# Allegro board 100ask_imx6ull_V11_1230FINAL.brd
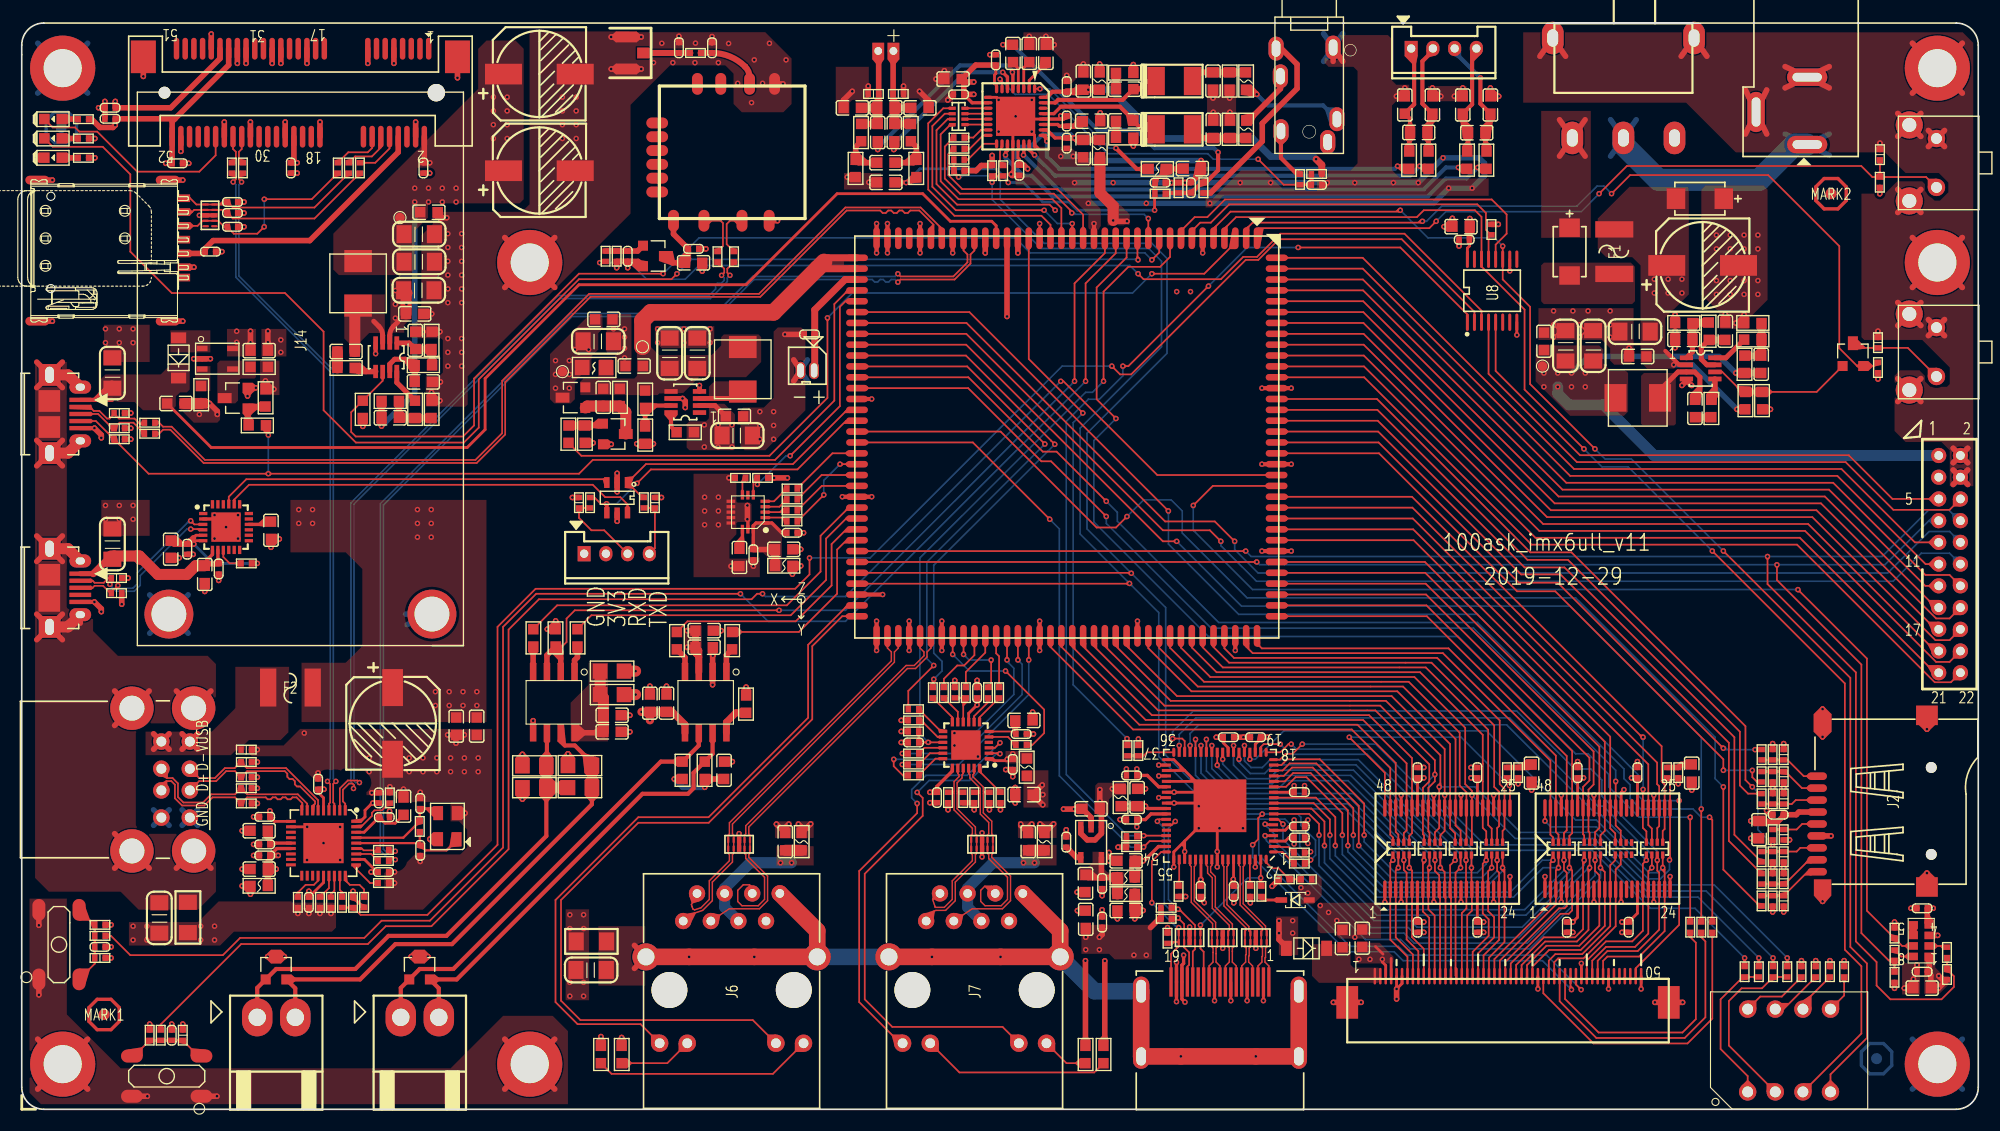
[diagram p0: board, top side]
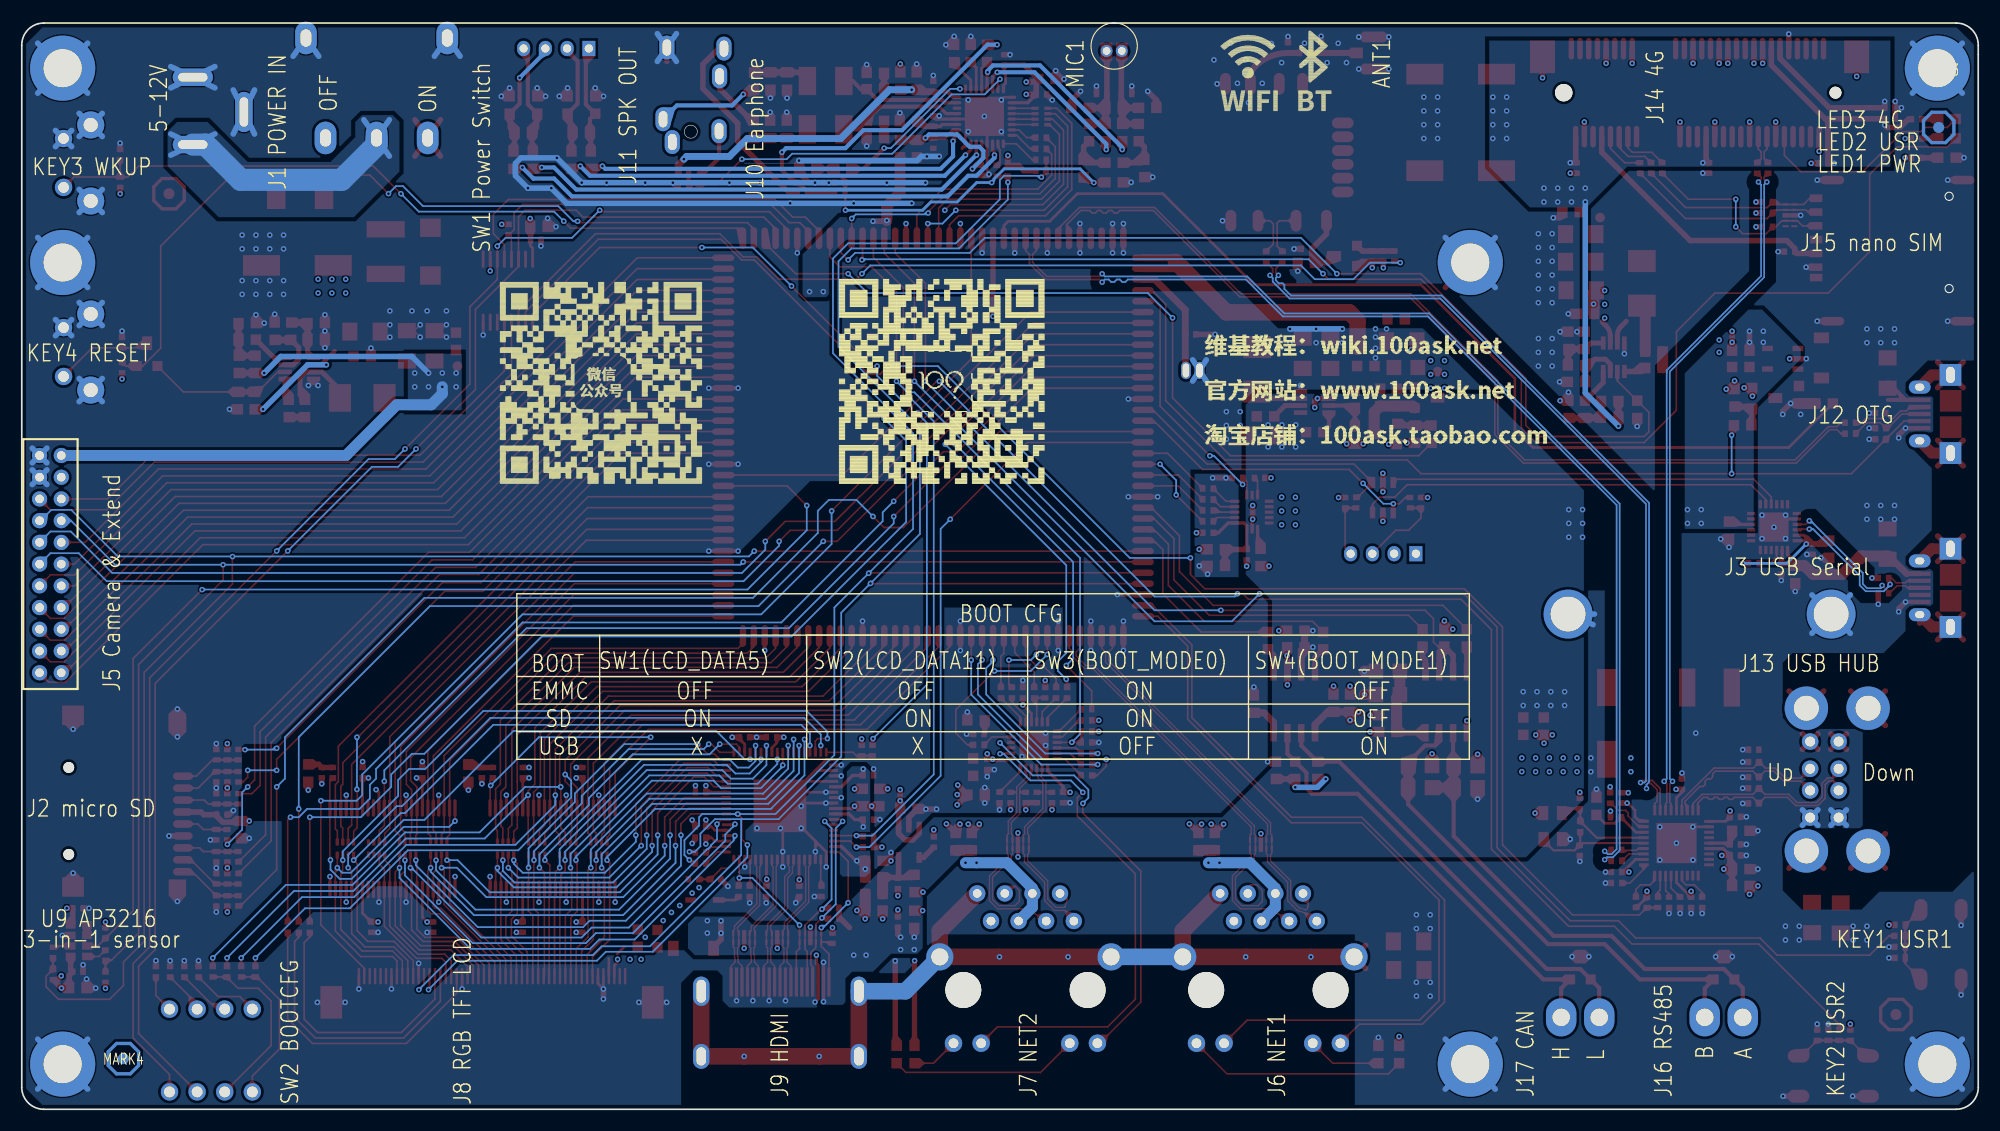
[diagram p1: board, bottom side, seen from below]

Outline 180 x 100 mm; copper layers: TOP, L2, L3, BOTTOM. Coordinates in mm from the lower left corner of the outline.
Outline path: 0,97.97 0,2.03 arc(0.6,0.6) 2.03,0 177.97,0 arc(179.4,0.6) 180,2.03 180,97.97 arc(179.4,99.4) 177.97,100 2.03,100 arc(0.6,99.4) 0,97.97

## Design rules (mm)
net group B_LCD_PWM: nets B_LCD_PWM LCD_PWM
net group DP1_USB: nets N16905183 N16905214
net group DP1_USB1: nets N16780958 N16781001
net group DP1_USB2: nets N16797858 N16797903
net group DP1_USB3: nets N16896158 N16896170
net group ENET1_RX: nets ENET1_RXN ENET1_RXP
net group ENET1_TX: nets ENET1_TXN ENET1_TXP
net group ENET2_RX: nets ETH2_RXN ETH2_RXP
net group ENET2_RXER: nets ENET2_RXER N16785209
net group ENET2_TX: nets ETH2_TXN ETH2_TXP
net group ENET2_TXD0: nets ENET2_TXD0 N16785249
net group ENET2_TXD1: nets ENET2_TXD1 N16785302
net group ENET2_TXEN: nets ENET2_TXEN N16785304
net group ENET_MDC: nets ENET_MDC N16785141
net group ENET_MDIO: nets ENET_MDIO N16785139
net group HDMI_CLK: nets HDMI_CLKN_CN HDMI_CLKP_CN
net group HDMI_TX0: nets HDMI_TXN0_CN HDMI_TXP0_CN
net group HDMI_TX1: nets HDMI_TXN1_CN HDMI_TXP1_CN
net group HDMI_TX2: nets HDMI_TXN2_CN HDMI_TXP2_CN
net group I2C1_SDA: nets I2C1_SDA N16783426
net group N16788694: nets N16788694 N16788723
net group RF: nets N16800183 WLAN_BT_RF0
net group USB_HUB1_D: nets USB_HUB1_DM USB_HUB1_DP
net group USB_HUB2_D: nets USB_HUB2_DM USB_HUB2_DP
net group USB_HUB3_D: nets USB_HUB3_DM USB_HUB3_DP
net group USB_HUB4_D: nets USB_HUB4_DM USB_HUB4_DP
net group USB_OTG1_D: nets USB_OTG1_DM USB_OTG1_DP
net group USB_OTG2_D: nets USB_OTG2_DM USB_OTG2_DP
net group SD_DATA: nets SD_CD SD_CLK SD_CMD SD_D0 SD_D1 SD_D2 SD_D3

## Placement (name value [footprint] x y rotation side)
ANT1  IPX  [ANT1]  55.61 97.24 90 top
C1  100uF/35V/SMD8X6.3  [CE_SM_8]  154.64 77.69 0 top
C2  100nF/6/25V  [C0603]  153.94 64.52 90 top
C3  10uF/12/25V  [C1206]  148.42 71.59 180 top
C4  100nF/6/25V  [C0603]  148.67 69.3 180 top
C5  15pF/6/25V  [C0603]  160.03 68.58 90 top
C6  10uF/12/25V  [C1206]  142.03 70.28 90 top
C7  10uF/12/25V  [C1206]  144.57 70.28 90 top
C8  100nF/6/25V  [C0603]  140.05 70.7 90 top
C9  100nF/6/25V  [C0603]  156.73 71.63 90 top
C10  1nF/6/25V  [C0603]  152.91 70.88 180 top
C11  10uF/12/25V  [C1206]  65.83 62.03 0 top
C12  100nF/6/25V  [C0603]  65.57 63.79 0 top
C13  100nF/6/25V  [C0603]  53.5 65.54 270 top
C14  10uF/12/25V  [C1206]  62.15 69.6 90 top
C15  10uF/12/25V  [C1206]  53.04 70.7 0 top
C16  10uF/12/25V  [C1206]  59.61 69.6 90 top
C17  100nF/6/25V  [C0603]  56.34 68.43 180 top
C18  100nF/6/25V  [C0603]  53.55 72.72 0 top
C19  100nF/6/25V  [C0603]  29.84 69.76 0 top
C20  10uF/12/25V  [C1206]  36.53 75.4 0 top
C21  100nF/6/25V  [C0603]  36.15 73.23 0 top
C22  15pF/6/25V  [C0603]  33.9 63.66 0 top
C23  10uF/12/25V  [C1206]  36.57 80.56 0 top
C24  10uF/12/25V  [C1206]  36.57 78.02 0 top
C25  100nF/6/25V  [C0603]  37.46 82.58 0 top
C26  100nF/6/25V  [C0603]  36.95 66.96 0 top
C27  1nF/6/25V  [C0603]  36.2 70.78 90 top
C28  10uF/6/10V  [C0603]  159.84 25.74 270 top
C29  100nF/4/25V  [C0402]  161.59 27.12 180 top
C31  1uF/6/16V  [C0603]  16.84 49.24 270 top
C32  100nF/4/25V  [C0402]  18.12 49.75 270 top
C33  1uF/6/16V  [C0603]  13.7 51.56 270 top
C34  100nF/4/25V  [C0402]  15.23 51.56 270 top
C35  10uF/6/10V  [C0603]  22.93 53.3 270 top
C37  100nF/4/25V  [C0402]  7.2 14.95 180 top
C38  100nF/4/25V  [C0402]  13.8 6.82 270 top
C39  10uF/6/10V  [C0603]  132.42 81.25 180 top
C40  100nF/4/25V  [C0402]  132.71 80.06 180 top
C41  470nF_1uF/6/10V  [C0603]  66.03 50.8 270 top
C42  100nF/4/25V  [C0402]  67.31 51.05 90 top
C43  10uF/6/10V  [C0603]  70.1 51.55 0 top
C44  100nF/4/25V  [C0402]  70.87 53.07 0 top
C45  1uF/6/16V  [C0603]  174.84 11.15 180 top
C46  100nF/4/25V  [C0402]  174.84 18.5 180 top
C47  100nF/4/25V  [C0402]  174.84 12.66 180 top
C50  10uF/6/10V  [C0603]  70.24 24.64 90 top
C52  10uF/6/10V  [C0603]  92.2 28.97 180 top
C53  100nF/4/25V  [C0402]  87.9 38.35 90 top
C54  100nF/4/25V  [C0402]  84.2 28.7 270 top
C55  100nF/4/25V  [C0402]  91.17 31.75 270 top
C56  100nF/4/25V  [C0402]  82.04 33.77 0 top
C57  10uF/6/10V  [C0603]  92.6 24.64 90 top
C58  10uF/6/10V  [C0603]  92.2 35.8 0 top
C59  100nF/4/25V  [C0402]  91.95 34.54 0 top
C61  10uF/6/10V  [C0603]  121.51 15.71 90 top
C63  100nF/4/25V  [C0402]  133.91 16.76 90 top
C64  100nF/4/25V  [C0402]  128.41 16.76 90 top
C65  100nF/4/25V  [C0402]  128.41 30.99 270 top
C66  100nF/4/25V  [C0402]  133.91 30.99 270 top
C67  10uF/6/10V  [C0603]  123.33 15.75 90 top
C69  10uF/6/10V  [C0603]  138.91 30.95 90 top
C70  100nF/4/25V  [C0402]  148.64 30.99 270 top
C71  100nF/4/25V  [C0402]  142.15 16.76 90 top
C72  100nF/4/25V  [C0402]  147.84 16.76 90 top
C73  100nF/4/25V  [C0402]  143.14 30.99 270 top
C74  10uF/6/10V  [C0603]  153.64 30.95 90 top
C75  10uF/6/10V  [C0603]  101.6 18.3 180 top
C76  100nF/4/25V  [C0402]  108.46 20.07 270 top
C77  100nF/4/25V  [C0402]  111.51 20.07 270 top
C78  10uF/6/10V  [C0603]  101.6 22.87 180 top
C79  100nF/4/25V  [C0402]  117.54 29.2 0 top
C80  100nF/4/25V  [C0402]  111.02 34.25 0 top
C81  100nF/4/25V  [C0402]  102.11 30.73 180 top
C82  100nF/4/25V  [C0402]  102.11 26.67 180 top
C83  100nF/4/25V  [C0402]  117.54 26.03 0 top
C84  10uF/6/10V  [C0603]  102.62 28.7 90 top
C85  100nF/4/25V  [C0402]  113.52 34.25 180 top
C86  100nF/4/25V  [C0402]  117.54 25.02 0 top
C88  10uF/6/10V  [C0603]  97.89 17.49 90 top
C89  100nF/4/25V  [C0402]  99.4 17.23 90 top
C90  10uF/6/10V  [C0603]  98.38 27.66 180 top
C91  22nF/4/25V  [C0402]  96.1 24.6 90 top
C92  10uF/6/10V  [C0603]  97.86 20.79 270 top
C93  100nF/4/25V  [C0402]  99.4 20.79 270 top
C94  10uF/6/10V  [C0603]  97.67 94.66 90 top
C95  100nF/4/25V  [C0402]  96.13 94.15 270 top
C96  100nF/4/25V  [C0402]  86.19 93.43 0 top
C97  100nF/4/25V  [C0402]  89.62 96.61 270 top
C98  10uF/6/10V  [C0603]  97.65 88.44 270 top
C99  10uF/6/10V  [C0603]  107.7 86.6 0 top
C100  100nF/4/25V  [C0402]  91.78 86.45 90 top
C101  100nF/4/25V  [C0402]  96.13 88.95 90 top
C102  100nF/4/25V  [C0402]  104.73 85.31 0 top
C103  10uF/6/10V  [C0603]  98.42 90.97 0 top
C104  100nF/4/25V  [C0402]  96.13 90.98 90 top
C105  220pF/4/50V  [C0402]  107.57 84.84 270 top
C106  47uF/6.3V  [CT_SM_B]  106.04 90.22 0 top
C107  47uF/6.3V  [CT_SM_B]  106.04 94.66 0 top
C108  1uF/6/16V  [C0603]  91.19 97.2 90 top
C109  100nF/6/25V  [C0603]  101.47 93.91 180 top
C110  100nF/6/25V  [C0603]  101.47 90.99 180 top
C111  100nF/6/25V  [C0603]  109.62 90.22 90 top
C112  100nF/6/25V  [C0603]  109.6 94.66 270 top
C113  1uF/6/16V  [C0603]  92.69 97.2 270 top
C114  1uF/6/16V  [C0603]  94.22 97.2 270 top
C115  100nF/4/25V  [C0402]  119.13 85.09 0 top
C116  1uF/6/16V  [C0603]  79.5 85.33 0 top
C117  33pF/6/50V  [C0603]  82.63 92.19 0 top
C118  15pF/6/50V  [C0603]  128.52 89.93 180 top
C119  15pF/6/50V  [C0603]  129.78 92.46 270 top
C120  15pF/6/50V  [C0603]  127.24 92.46 270 top
C121  100nF/6/25V  [C0603]  80.28 89.92 90 top
C122  33pF/6/50V  [C0603]  79.5 92.19 0 top
C123  10uF/6/10V  [C0603]  79.5 87.15 180 top
C124  100nF/6/25V  [C0603]  78.75 89.92 90 top
C125  33pF/6/50V  [C0603]  76.41 92.19 0 top
C126  15pF/6/50V  [C0603]  133.86 89.9 0 top
C127  15pF/6/50V  [C0603]  132.58 92.46 270 top
C128  15pF/6/50V  [C0603]  135.12 92.46 270 top
C129  10uF/6/10V  [C0603]  21.84 69.84 0 top
C130  10uF/6/10V  [C0603]  21.84 22.11 180 top
C131  100nF  [C0402]  22.35 26.92 180 top
C132  100nF  [C0402]  22.35 23.37 180 top
C133  100nF  [C0402]  26.42 19.05 270 top
C134  100nF  [C0402]  33.27 21.84 0 top
C135  100nF  [C0402]  32.85 28.66 90 top
C136  100nF  [C0402]  27.26 29.93 90 top
C138  100nF/6/25V  [C0603]  14.18 64.97 0 top
C139  1uF/6/16V  [C0603]  35.12 27.9 270 top
C140  100nF  [C0402]  33.36 26.89 180 top
C141  1uF/6/16V  [C0603]  21.84 25.64 0 top
C142  100nF  [C0402]  22.35 24.38 0 top
C143  18pF/4/25V  [C0402]  36.66 23.84 90 top
C144  18pF/4/25V  [C0402]  36.66 28.16 270 top
C145  10nF/1KV/1206  [C1206]  12.66 17.61 90 top
C146  100uF/25V  [CE_SM_8]  34.12 35.52 270 top
C147  100nF/6/25V  [C0603]  41.85 35.27 270 top
C149  10uF/6/10V  [C0603]  61.81 77.93 0 top
C150  100nF/4/25V  [C0402]  55.75 78.53 90 top
C151  100nF/4/25V  [C0402]  61.81 79.21 0 top
C152  220uF/25V/SMD8X6.3  [CE_SM_8]  47.62 95.3 0 top
C153  220uF/25V/SMD8X6.3  [CE_SM_8]  47.62 86.41 0 top
C154  100nF/4/25V  [C0402]  8.13 92.2 180 top
C155  100nF/4/25V  [C0402]  8.13 91.19 180 top
C156  100nF/4/25V  [C0402]  36.95 86.66 270 top
C157  100nF/4/25V  [C0402]  14.31 87.08 0 top
C158  100nF/4/25V  [C0402]  24.76 86.66 270 top
C159  100nF/4/25V  [C0402]  60.46 97.72 90 top
C160  100nF/4/25V  [C0402]  63.51 97.72 90 top
C161  100nF/4/25V  [C0402]  17.36 78.96 0 top
C162  33pF/4/25V  [C0402]  19.39 81.24 0 top
C163  33pF/4/25V  [C0402]  19.39 82.51 0 top
C164  33pF/4/25V  [C0402]  19.39 83.53 0 top
C165  10uF/6/10V  [C0603]  54.31 36.27 0 top
C166  1uF/6/16V  [C0603]  54.31 34.75 0 top
C167  10uF/6/10V  [C0603]  59.32 37.38 90 top
C168  100nF/6/25V  [C0603]  57.79 37.38 90 top
C169  100nF/6/25V  [C0603]  62.78 42.54 0 top
C170  10uF/6/10V  [C0603]  62.78 44.06 0 top
C171  47nF/6/50V  [C0603]  64.61 31.2 90 top
C172  10uF/6/10V  [C0603]  85.68 94.84 180 top
C173  100nF/4/25V  [C0402]  72.47 71.34 180 top
C174  10nF/1KV/1206  [C1206]  52.38 12.83 0 top
C175  10uF/12/25V  [C1206]  8.34 67.78 90 top
C177  10uF/12/25V  [C1206]  8.34 52.03 90 top
C179  1uF/6/16V  [C0603]  39.97 35.27 90 top
D1  SS14-E3/61T  [DO-214AC]  142.4 78.96 270 top
D2  SMBJ12A-E3/52  [DO-214AC]  154.39 83.83 180 top
D3  MBR120VLSFT1G  [SOD123FL]  118.2 14.82 180 top
D4  RB521S30T1G  [SOD323]  115.91 19.27 0 top
D6  MBR120VLSFT1G  [SOD123FL]  14.43 69.17 90 top
D7  PSOT05C-LF-T7  [SOT23]  23.39 12.95 0 top
D8  NUP2105LT1G  [SOT23]  36.6 12.95 0 top
D41  BAT54CLT1G  [SOT23]  168.47 69.43 0 top
E1  TVS  [TVS0402]  162.1 32.64 270 top
E2  TVS  [TVS0402]  162.1 30.61 90 top
E3  TVS  [TVS0402]  162.1 28.58 270 top
E4  TVS  [TVS0402]  162.1 25.28 90 top
E5  TVS  [TVS0402]  162.1 23.25 90 top
E6  TVS  [TVS0402]  162.1 21.21 270 top
E7  TVS  [TVS0402]  162.1 19.18 90 top
E8  TVS  [TVS0402]  8.72 47.51 180 top
E9  TVS  [TVS0402]  8.72 48.91 180 top
E10  TVS  [TVS0402]  51.26 55.84 270 top
E11  TVS  [TVS0402]  58.25 55.84 270 top
E12  TVS  [TVS0402]  7.2 13.93 180 top
E13  TVS  [TVS0402]  14.82 6.82 270 top
E14  TVS  [TVS0402]  170.95 87.88 270 top
E15  TVS  [TVS0402]  170.77 70.57 270 top
E16  ULC0544P10_AZ1045-04F  [DFN2510_10]  113.54 15.8 0 top
E17  ULC0544P10_AZ1045-04F  [DFN2510_10]  110.49 15.8 0 top
E18  ULC0544P10_AZ1045-04F  [DFN2510_10]  107.44 15.8 0 top
E19  ESD5451X  [TVS0402]  78.36 93.47 180 top
E20  ESD5451X  [TVS0402]  80.65 93.47 0 top
E21  TVS  [TVS0402]  8.97 61.68 180 top
E22  TVS  [TVS0402]  8.97 62.7 180 top
E23  TVS  [TVS0402]  8.97 64.1 180 top
E27  ULC0544P10  [DFN2510_10]  17.32 82.3 270 top
E28  ULC0544P10_AZ1045-04F  [DFN2510_10]  66 24.4 0 top
E29  ULC0544P10_AZ1045-04F  [DFN2510_10]  88.35 24.4 0 top
E30  TVS  [TVS0402]  20.66 33.11 180 top
E31  TVS  [TVS0402]  20.66 31.97 180 top
E32  TVS  [TVS0402]  20.66 30.57 180 top
E33  TVS  [TVS0402]  20.66 29.55 180 top
E34  TVS  [TVS0402]  20.66 28.16 180 top
F1  2A  [F1812]  146.51 78.96 90 top
F2  SMD1812P100TF_1A  [F1812]  24.72 38.82 180 top
FB1  150R  [FB0603]  70.1 50.03 0 top
FB2  220R  [FB0603]  71.74 24.64 270 top
FB3  150R  [FB0603]  92.47 31.5 90 top
FB4  220R  [FB0603]  94.09 24.64 270 top
FB5  150R@100M@800ma  [FB0603]  101.6 19.82 180 top
FB6  150R@100M@800ma  [FB0603]  101.6 21.35 180 top
FB7  150R@100M@800ma  [FB0603]  101.1 28.7 90 top
FB8  150R@100M@800ma  [FB0603]  99.17 94.66 270 top
FB9  150R@100M@800ma  [FB0603]  99.19 88.44 90 top
FB10  150R@100M@800ma  [FB0603]  104.48 86.56 0 top
FB11  120R  [FB0603]  112.66 90.22 90 top
FB12  120R  [FB0603]  112.63 94.66 270 top
FB13  150R@100M@800ma  [FB0603]  21.84 20.56 0 top
FB14  220R_0805  [FB0805]  52.66 68.29 180 top
H1  Hole  [NPTH3A5PAD6]  3.77 4.15 180 top
H2  Hole  [NPTH3A5PAD6]  46.74 77.95 180 top
H3  Hole  [NPTH3A5PAD6]  46.74 4.15 180 top
H4  Hole  [NPTH3A5PAD6]  3.77 95.84 180 top
H5  Hole  [NPTH3A5PAD6]  176.23 4.15 180 top
H6  Hole  [NPTH3A5PAD6]  176.23 95.84 180 top
H7  Hole  [NPTH3A5PAD6]  176.23 77.95 180 top
J1  DC JACK  [DC-49100500000W]  164.26 95.21 0 top
J2  MicroSD  [SD-MR01A-01211]  172.58 28.32 90 top
J3  Micro USB  [MICROUSB-B-H4-2]  -0.06 48.01 0 top
J4  PH_1X4_2A0  [SIP4_2_TH_V]  51.74 51.15 0 top
J5  CAMERA_PORT  [PH2X11_2_TH_V]  177.36 51.19 270 top
J6  HR911105A  [RJ45-HR91105A]  65.31 10.98 180 top
J7  HR911105A  [RJ45-HR91105A]  87.66 10.98 180 top
J8  myir_LCD_port  [FPC50_0A5_SM_H]  124.49 12.25 180 top
J9  CON HDMI 1X19  [CON_RA_HDMI_19P_0P5_SM]  110.24 6.34 0 top
J10  PJ324B-PH  [AUDIO6_14X6A25_TH_H]  118.45 100.55 0 top
J11  PH_1X4_2A0  [SIP4_2_TH_V]  127.83 97.66 0 top
J12  Micro USB  [MICROUSB-B-H4-2]  -0.06 64.01 0 top
J13  usb_dual_host  [USB2-A]  8.58 30.35 90 top
J14  4G_EC20_ME909S  [CONN-679101002]  25.64 93.59 180 top
J15  Nano SIM  [SIM_CARD_13X14A5]  14.91 76.57 270 top
J16  CON1X2  [ALM2_3A5_H_SEAL]  23.41 8.46 0 top
J17  CON1X2  [ALM2_3A5_H_SEAL]  36.62 8.46 0 top
J18  CR1220_3V  [SIP2_1A25_TH_V]  72.9 68.02 180 top
KEY1  KEY  [SW4_5A2_SM]  3.43 15.16 90 top
KEY2  KEY  [SW4_5A2_SM]  13.33 3.05 180 top
KEY3  POWER  [SW4_TH_6X6]  173.65 87.12 90 top
KEY4  POWER  [SW4_TH_6X6]  173.65 69.71 90 top
L1  4.7uH/5.2X5.4/3A  [LP_5A2X5A4]  148.67 65.49 180 top
L2  1uH  [LP_5A2X5A4]  66.33 68.12 90 top
L3  4.7uH/5.2X5.4/3A  [LP_5A2X5A4]  30.94 76.03 90 top
LED1  POWER_LED  [LED0603]  2.88 87.6 180 top
LED2  LED-0603  [LED0603]  2.88 89.38 180 top
LED3  LED-0603  [LED0603]  2.88 91.16 180 top
MARK1  -  [MARK]  7.58 8.72 180 top
MARK2  -  [MARK]  166.45 84.29 180 top
MARK3  -  [MARK]  3.64 90.39 270 bottom
MARK4  -  [MARK]  170.64 4.66 270 bottom
MIC1  Micphone  [MIC_DIP2]  79.5 97.88 180 top
Q1  AO3415  [SOT23]  50.85 65.52 90 top
Q2  AO3416  [SOT23]  54.47 62.17 270 top
Q3  L9014  [SOT23]  19.77 65.47 90 top
Q4  AO3415_IRLML6401TR  [SOT23]  58.16 78.55 270 top
R1  10R/6/1%  [R0603]  155.44 64.52 270 top
R2  30K/6/1%  [R0603]  158.57 65.24 270 top
R3  100K/6/1%  [R0603]  155.21 71.63 90 top
R4  15K/6/1%  [R0603]  159.26 70.85 0 top
R5  43K/6/1%  [R0603]  158.48 68.58 270 top
R6  10K/6/1%  [R0603]  152.91 72.38 0 top
R7  8.25K/6/1%  [R0603]  159.26 72.38 0 top
R8  51K/6/1%  [R0603]  160.12 65.24 90 top
R9  10K/6/1%  [R0603]  61.04 62.33 180 top
R10  30K/1%  [R0603]  57.35 65.37 270 top
R11  10K/6/1%  [R0603]  55.02 65.54 270 top
R12  4.7K/4/1%  [R0402]  5.67 87.59 0 top
R13  6.8K/6/1%  [R0603]  57.35 62.06 270 top
R14  1K/6/1%  [R0603]  50.3 62.15 90 top
R15  10K/6/1%  [R0603]  51.8 62.15 270 top
R16  0R/6/5%  [R0603]  29.84 68.26 180 top
R17  100K/6/1%  [R0603]  36.95 68.49 0 top
R18  10K/6/1%  [R0603]  31.38 64.43 90 top
R19  15K/6/1%  [R0603]  36.18 64.43 270 top
R20  43K/6/1%  [R0603]  33.9 65.21 180 top
R21  10K/6/1%  [R0603]  37.7 70.78 270 top
R22  13K/6/1%  [R0603]  37.7 64.43 270 top
R23  1K/4/1%  [R0402]  159.81 12.66 90 top
R24  1K/4/1%  [R0402]  158.5 12.66 90 top
R25  1K/4/1%  [R0402]  163.74 12.66 270 top
R26  47K/4/1%  [R0402]  161.08 30.61 90 top
R27  1K/4/1%  [R0402]  161.12 12.66 90 top
R28  47K/4/1%  [R0402]  161.08 23.25 90 top
R29  47K/4/1%  [R0402]  161.08 21.21 270 top
R30  1K/4/1%  [R0402]  165.04 12.66 270 top
R31  47K/4/1%  [R0402]  161.08 32.64 270 top
R32  1K/4/1%  [R0402]  162.43 12.66 90 top
R33  47K/4/1%  [R0402]  161.09 28.58 270 top
R34  47K/4/1%  [R0402]  161.08 19.18 90 top
R35  1K/4/1%  [R0402]  166.35 12.66 270 top
R36  1K/4/1%  [R0402]  167.66 12.66 270 top
R37  22R/4/1%  [R0402]  160.07 32.64 270 top
R38  22R/4/1%  [R0402]  160.07 30.61 90 top
R39  22R/4/1%  [R0402]  160.07 28.58 270 top
R40  22R/4/1%  [R0402]  161.08 25.28 90 top
R41  22R/4/1%  [R0402]  160.07 23.25 90 top
R42  22R/4/1%  [R0402]  160.07 21.21 270 top
R43  22R/4/1%  [R0402]  160.07 19.18 90 top
R44  4.7K/4/1%  [R0402]  20.66 50.25 0 top
R46  10K/4/1%  [R0402]  7.2 16.98 180 top
R47  10K/4/1%  [R0402]  11.77 6.82 270 top
R48  470R/4/1%  [R0402]  12.78 6.82 90 top
R49  470R/4/1%  [R0402]  7.2 15.96 0 top
R50  1K/4/1%  [R0402]  5.67 89.37 180 top
R51  2.2K/4/1%  [R0402]  172.3 12.15 270 top
R52  2.2K/4/1%  [R0402]  177.12 12.41 270 top
R53  2.2K/4/1%  [R0402]  89.28 86.41 90 top
R54  2.2K/4/1%  [R0402]  86.23 86.41 0 top
R55  10K/4/1%  [R0402]  135.21 80.99 270 top
R56  0R/4/5%  [R0402]  70.87 54.11 180 top
R57  0R/4/5%  [R0402]  177.12 14.44 270 top
R58  0R/4/5%  [R0402]  70.87 56.15 180 top
R59  0R/4/5%  [R0402]  70.87 55.13 180 top
R60  0R/4/5%  [R0402]  70.87 57.15 180 top
R61  0R/4/5%  [R0402]  172.3 14.19 270 top
R62  10K/4/1%  [R0402]  68.16 58.13 0 top
R63  0R/4/5%  [R0402]  66.12 58.13 180 top
R64  10K/4/1%  [R0402]  172.3 16.22 90 top
R65  100K/4/1%  [R0402]  170.94 85.34 270 top
R66  100K/4/1%  [R0402]  170.77 68.29 270 top
R67  470R/6/1%  [R0603]  53.28 5.04 270 top
R68  470R/6/1%  [R0603]  55.19 5.04 270 top
R70  49.9R/4/1%  [R0402]  86.61 28.7 90 top
R71  49.9R/4/1%  [R0402]  85.22 28.7 90 top
R72  49.9R/4/1%  [R0402]  89.03 28.7 90 top
R73  49.9R/4/1%  [R0402]  87.63 28.7 90 top
R74  10K/4/1%  [R0402]  82.04 34.79 0 top
R75  22R/4/1%  [R0402]  83.82 38.35 270 top
R76  22R/4/1%  [R0402]  82.04 36.83 0 top
R77  22R/4/1%  [R0402]  88.9 38.35 270 top
R78  22R/4/1%  [R0402]  89.92 38.35 270 top
R79  22R/4/1%  [R0402]  84.84 38.35 270 top
R80  22R/4/1%  [R0402]  86.86 38.35 270 top
R81  10K/4/1%  [R0402]  85.84 38.35 270 top
R82  22R/4/1%  [R0402]  82.04 31.74 0 top
R83  22R/4/1%  [R0402]  82.04 30.73 0 top
R84  22R/4/1%  [R0402]  82.04 32.75 0 top
R85  10K/4/1%  [R0402]  82.04 35.8 0 top
R86  470R/6/1%  [R0603]  97.86 5.04 270 top
R87  22R/4/1%  [R0402]  91.95 33.54 180 top
R88  12.1K/4/1%  [R0402]  90.04 28.7 90 top
R89  470R/6/1%  [R0603]  99.51 5.04 270 top
R91  0R/4/5%  [R0402]  136.64 30.99 270 top
R92  1K/4/1%  [R0402]  137.67 30.99 270 top
R93  22R/4/5%  [R0402]  155.53 16.76 270 top
R94  0R/4/5%  [R0402]  151.37 30.99 270 top
R95  1K/4/1%  [R0402]  152.4 30.99 270 top
R96  10K/4/1%  [R0402]  114.05 20.07 90 top
R97  4.3K_5.1K/4/1%  [R0402]  106.43 20.07 270 top
R98  10K/4/1%  [R0402]  105.41 15.75 270 top
R99  10K/4/1%  [R0402]  102.73 33.02 270 top
R100  0R/4/5%  [R0402]  101.73 33.02 270 top
R101  10K/4/1%  [R0402]  102.11 25.13 0 top
R102  10K/4/1%  [R0402]  102.11 24.13 0 top
R103  2.2K/4/1%  [R0402]  105.28 18.54 180 top
R104  20R/4/1%  [R0402]  117.54 22.62 180 top
R105  2.2K/4/1%  [R0402]  105.28 17.54 180 top
R106  20R/4/1%  [R0402]  117.54 23.63 180 top
R107  10K/4/1%  [R0402]  118.19 21.17 180 top
R109  4.7K/4/1%  [R0402]  116.16 21.17 0 top
R110  1K/4/1%  [R0402]  113.03 20.07 90 top
R113  2.2K/4/1%  [R0402]  104.73 84.29 0 top
R114  100R/4/1%  [R0402]  108.71 84.84 270 top
R115  47K/4/1%  [R0402]  106.43 84.84 270 top
R120  0R/4/5%  [R0402]  86.23 89.45 0 top
R121  0R/4/5%  [R0402]  86.23 88.43 0 top
R122  0R/4/5%  [R0402]  86.23 87.42 0 top
R123  0R/4/5%  [R0402]  90.29 86.41 90 top
R124  1K/6/1%  [R0603]  111.15 90.22 90 top
R125  1K/6/1%  [R0603]  111.12 94.66 270 top
R126  10K/4/1%  [R0402]  119.13 86.11 180 top
R127  1K/6/1%  [R0603]  101.47 95.41 0 top
R128  1K/6/1%  [R0603]  101.47 89.44 0 top
R129  1K/4/1%  [R0402]  117.6 85.6 270 top
R130  1K/6/1%  [R0603]  82.31 86.61 90 top
R131  0R/6/5%  [R0603]  127.65 87.38 90 top
R132  1.5K/6/1%  [R0603]  81.8 89.92 90 top
R133  0R/6/5%  [R0603]  129.43 87.38 90 top
R134  0R/6/5%  [R0603]  134.76 87.38 90 top
R135  1.5K/6/1%  [R0603]  77.23 89.92 90 top
R136  0R/6/5%  [R0603]  132.98 87.38 90 top
R137  1K/6/1%  [R0603]  76.72 86.61 90 top
R138  10K/4/1%  [R0402]  31.5 19.05 270 top
R139  0R/4/5%  [R0402]  33.27 22.86 180 top
R140  10K/4/1%  [R0402]  30.48 19.05 270 top
R141  0R/4/5%  [R0402]  33.27 23.88 180 top
R142  0R/4/5%  [R0402]  29.46 19.05 90 top
R143  100K/4/1%  [R0402]  33.27 20.83 180 top
R144  10K/6/1%  [R0603]  21.84 68.34 180 top
R145  100K/4/1%  [R0402]  25.4 19.05 90 top
R146  100K/4/1%  [R0402]  27.43 19.05 90 top
R147  100K/4/1%  [R0402]  28.45 19.05 90 top
R148  12K/4/1%  [R0402]  33.87 28.66 270 top
R149  10K/6/1%  [R0603]  21.67 62.97 180 top
R150  6.8K/6/1%  [R0603]  16.5 65.79 270 top
R151  1M/4/1%  [R0402]  36.62 26.04 270 top
R152  0R/4/1%  [R0402]  11.77 63.21 180 top
R153  0R/4/1%  [R0402]  11.77 62.19 180 top
R154  0R/1206/5%  [R1206]  15.29 17.66 90 top
R156  1K/4/1%  [R0402]  5.67 91.15 0 top
R157  0R/4/5%  [R0402]  20.35 86.66 270 top
R158  0R/4/5%  [R0402]  19.33 86.66 270 top
R159  0R/4/5%  [R0402]  65.53 78.49 90 top
R160  0R/4/5%  [R0402]  64.01 78.49 90 top
R161  22R/4/1%  [R0402]  31.11 86.66 270 top
R162  22R/4/1%  [R0402]  30.09 86.66 270 top
R163  22R/4/1%  [R0402]  29.08 86.66 270 top
R164  10K/4/1%  [R0402]  54.73 78.53 90 top
R165  1K/4/1%  [R0402]  53.72 78.53 90 top
R166  0R/4/1%  [R0402]  61.98 97.24 0 top
R167  0R/8/5%  [R0805]  54.31 38.18 0 top
R168  0R/8/5%  [R0805]  54.31 40.34 0 top
R169  10K/8/1%  [R0805]  47.16 31.62 0 top
R170  10K/8/1%  [R0805]  47.16 29.61 180 top
R171  22R/6/1%  [R0603]  51.13 43.4 270 top
R172  22R/6/1%  [R0603]  47.06 43.4 270 top
R173  10K/8/1%  [R0805]  51.35 31.64 180 top
R174  120R/8/1%  [R0805]  51.35 29.61 180 top
R175  10K/6/1%  [R0603]  49.12 43.4 90 top
R176  0R/6/5%  [R0603]  65.35 43.14 270 top
R177  4.7K/6/1%  [R0603]  66.64 37.3 90 top
R178  0R/6/5%  [R0603]  60.27 43.14 270 top
R179  60.4R/6/1%  [R0603]  62.83 31.2 90 top
R180  60.4R/6/1%  [R0603]  60.8 31.2 90 top
R181  10K/6/1%  [R0603]  22.42 65.49 270 top
R182  0R/1206/5%  [R1206]  52.41 15.46 0 top
R183  22R/4/5%  [R0402]  154.52 16.76 270 top
R184  22R/4/5%  [R0402]  153.5 16.76 270 top
R185  0R/4/5%  [R0402]  57.23 55.84 270 top
R186  0R/4/5%  [R0402]  52.28 55.84 270 top
RN1  RN0402/22R/1%  [RN4_0402]  126.9 23.99 0 top
RN2  RN0402/22R/1%  [RN4_0402]  129.76 23.99 0 top
RN3  RN0402/22R/1%  [RN4_0402]  132.62 23.99 0 top
RN4  RN0402/22R/1%  [RN4_0402]  135.49 23.99 0 top
RN5  RN0402/22R/1%  [RN4_0402]  141.63 23.99 0 top
RN6  RN0402/22R/1%  [RN4_0402]  144.49 23.99 0 top
RN7  RN0402/22R/1%  [RN4_0402]  147.36 23.99 0 top
RN8  RN0402/22R/1%  [RN4_0402]  150.22 23.99 0 top
RN9  RN0402/0R/5%  [RN4_0402]  86.19 91.4 90 top
SW1  SWITH-5P  [SW5_4A7_12A7]  147.35 89.42 180 top
SW2  218-4LPSTR  [SW2X4_2A54_10A8X14A5]  162.6 5.41 0 top
T_3V3_1  TestPoint  [TP_0A9MM]  49.74 67.91 180 top
T_3V3_2  TestPoint  [TP_0A9MM]  57.11 70.19 0 top
T_4G1  TestPoint  [TP_0A9MM]  34.79 82.09 270 top
T_5V1  TestPoint  [TP_0A9MM]  139.91 68.41 0 top
U1  myir_board  [YOUPK37X39_1_00-SMD]  96.15 61.89 270 top
U2  MP1495S  [TSOT23_8_0P65_2X1]  154.46 68.21 0 top
U3  MP2143DJ  [TSOT23_8_0P65_2X1]  61.04 65.11 180 top
U4  MP1495S  [TSOT23_8_0P65_2X1]  33.53 69.23 270 top
U5  CP2104  [QFN24]  18.8 53.59 0 top
U6  SN74LVC2G17DCKR  [SOT23_6]  54.78 56.3 180 top
U7  ICM-20608-G  [SENSOR_ICM-20608]  66.81 54.97 180 top
U8  SN74HC595  [TSSOP16]  135.27 75.36 90 top
U9  AP3216C  [SENSOR_AP3216C]  174.75 15.52 180 top
U11  LAN8720A  [QFN24]  86.87 33.53 180 top
U13  74LVCH162245_74LVC16245A  [TSSOP48-19P7X295]  131.16 23.99 0 top
U14  74LVCH162245_74LVC16245A  [TSSOP48-19P7X295]  145.89 23.99 0 top
U15  SIL9022A  [QFN72_0P5_10X10_4P85SQ]  110.24 27.94 180 top
U16  RT9013-12GB  [SOT23_5]  98.38 24.58 180 top
U17  WM8960  [QFN32-19P7-2TH]  91.44 91.41 270 top
U18  USB2514Bi-AEZG_QFN36  [QFN36_0A5_6X6]  27.76 24.5 270 top
U19  SY6280AAAC  [SOT23_5]  17.99 69.1 270 top
U20  RTL8723  [RL-UM02WBS-8723BU]  65.36 88.1 270 top
U21  SP3485  [SOIC8]  48.95 37.46 180 top
U22  TJA1042T/3  [SOIC8]  62.92 37.46 180 top
X1  XTAL_24M  [XR4_3225_SM]  39.16 26.07 90 top

## Library data of the parts
ANT1 = IPX
C1 C146 C152 C153 = CAPACITOR POL
C2 C4 C5 C8-C10 C12 C13 C17-C19 C21 C22 C25-C27 C29 C31-C34 C37 C38 C40-C42 C44-C47 C53-C56 C59 C63-C66 C70-C73 C76 C77 C79-C83 C85 C86 C95-C97 C100-C102 C104 C105 C108-C122 C124-C128 C131-C136 C138-C144 C147 C150 C151 C154-C158 C161-C164 C166 C168 C169 C171 C173 C179 = CAP NP
C3 C6 C7 C11 C14-C16 C23 C24 C175 C177 = CERAMIC CAPACITOR: User Part Number: HAMP; Tolerance: #TOL
C20 C145 C174 = CAP NP: User Part Number: HAMP; Tolerance: #TOL
C28 = CERAMIC CAPACITOR: signal model: R_R0603_33R_33R
C35 C39 C43 C50 C52 C57 C58 C61 C67 C69 C74 C75 C78 C84 C88 C90 C92 C94 C98 C99 C103 C123 C129 C130 C149 C165 C167 C170 C172 = CERAMIC CAPACITOR
C89 C91 C159 C160 = 1C_10uFCapacitor16V10%0805
C93 = 1C_0.1uFCapacitor16V10%0402
C106 C107 = CAPACITOR_POL_0
D1 = General Diode
D2 = GENERAL DIODE
D3 D4 = DIODE SMD_0
D6 = DIODE SCHOTTKY
D7 D8 = DOUBLE TVS Diode
D41 = BAT54C
E1-E15 E21-E23 E30-E34 = TVS Diode
E16-E18 E28 E29 = rRClamp0524P
E19 E20 = 1_1.5KE100A
E27 = rRClamp0524P_0
F1 F2 = FUSE
FB1 FB3 FB5-FB13 = FB
FB2 FB4 FB14 = INDUCTOR
H1-H7 = Mounting Hole_0
J1 = DC-JACK
J2 = MicroSD_0
J3 J12 = MiniUSB-b_0
J4 = PH_1X4_0
J5 = CAMERA_PORT_0
J6 J7 = HR911105A_0
J8 = myir_LCD_port_1
J9 = ATOM010130010052_HDMI_1
J10 = PJ324B_0: Tolerance: v
J11 = PH_1X4_2A0
J13 = usb_dual_host_0
J14 = 4G_EC20_ME909S_3
J15 = Nano SIM_0
J16 J17 = CON1X2
J18 = BatteryHolder_1225
KEY1 KEY2 = SW_PUSH_2
KEY3 KEY4 = SW_PUSH_0
L1-L3 = Inductor
LED1-LED3 = LED
MARK1-MARK4 = ID-BOARD_1
MIC1 = Micphone_0
Q1 Q4 = MOSFET_P
Q2 = MOSFET_N
Q3 = L14P2/TO_1
R1-R4 R8 R11 R15-R17 R19 R23-R44 R48 R49 R56-R60 R94-R96 R99 R100 R107 R113-R115 R120-R137 R140 R157-R168 R170-R172 R174 R176-R178 R183-R186 = R1_0805
R5-R7 R9 R10 R12-R14 R18 R20-R22 R46 R47 R50-R55 R97 R98 R101-R106 R109 R110 R138 R139 R141-R153 R156 R169 R173 R175 R179-R181 = R
R61 R70-R73 R91-R93 = R1_0805: signal model: R_R0603_33R_33R
R62 R64-R66 = R: signal model: R_R0603_33R_33R
R63 = Resister_0: signal model: R_R0603_33R_33R
R67 R68 R74-R76 R80 R82-R86 R88 R89 = RESISTOR: signal model: R_R0603_33R_33R
R77-R79 R81 R87 = RESISTOR
R154 R182 = R: User Part Number: HAMP; Tolerance: #TOL
RN1-RN9 = RESISTOR DIP 4
SW1 = SWITH-5P_1
SW2 = SWITCH-4_0
T_3V3_1 T_3V3_2 T_4G1 T_5V1 = TestPoint
U1 = myir_board_2
U2 = MP1495S_1
U3 = MP2143DJ_0
U4 = MP1495S_2
U5 = CP2104
U6 = SN74LVC2G17DCKR_0
U7 = ICM-20608
U8 = SN74HC595_1
U9 = AP3216C_1
U11 = LAN8720A
U13 U14 = 74LVCH162245_4
U15 = sil9022_2
U16 = RT9016
U17 = WM8960_QFN_2
U18 = USB2514QFN36_5
U19 = STMPS2141_0
U20 = RTL8723
U21 = SP3485
U22 = TJA1042T/3
X1 = XTAL_1

## Footprints (pads in the part's own frame, mm; a bottom-side part is the same pattern mirrored in y, then rotated)
ALM2_3A5_H_SEAL
  oval 2.8x3.5 hole 1.6: 1(-1.75,0) 2(1.75,0)
ANT1
  rect 1x1.05 smd: 1(0,-1.525)
  rect 1x1.9 smd: 2(1.475,0) 3(-1.475,0)
AUDIO6_14X6A25_TH_H
  oval 1.4x2.2 hole 0.8x1.5: 1(2.2,-2.8) 2(-3.05,-2.9) 3(-2.65,-5.45) 4(-2.6,-10.5) 5(1.7,-11.5) 6(2.55,-9.4)
C0402
  rect 0.5x0.6 smd: 1(-0.479,0) 2(0.479,0)
C0603
  rect 0.965x0.965 smd: 1(-0.8,0) 2(0.8,0)
C1206
  rect 1.397x1.651 smd: 1(-1.397,0) 2(1.397,0)
CE_SM_8
  rect 3.404x1.905 smd: 1(-3.3,0) 2(3.3,0)
CON_RA_HDMI_19P_0P5_SM
  rect 0.305x2.692 smd: 1(4.5,5.375) 2(4,5.375) 3(3.5,5.375) 4(3,5.375) 5(2.5,5.375) 6(2,5.375) 7(1.5,5.375) 8(1,5.375) 9(0.5,5.375) 10(0,5.375) 11(-0.5,5.375) 12(-1,5.375) 13(-1.5,5.375) 14(-2,5.375) 15(-2.5,5.375) 16(-3,5.375) 17(-3.5,5.375) 18(-4,5.375) 19(-4.5,5.375)
  oval 1.499x2.692 hole 0.889x2.108: G1(7.25,4.525) G2(-7.25,4.525)
  oval 1.499x2.286 hole 0.889x1.676: G3(7.25,-1.475) G4(-7.25,-1.475)
CONN-679101002
  round 1.6 hole 1.6 unplated: (-12.5,0)
  round 1.1 hole 1.1 unplated: (12.5,0)
  oval 0.5x2 smd: 1(-11.8,-4.05) 2(-11.4,4.05) 3(-11,-4.05) 4(-10.6,4.05) 5(-10.2,-4.05) 6(-9.8,4.05) 7(-9.4,-4.05) 8(-9,4.05) 9(-8.6,-4.05) 10(-8.2,4.05) 11(-7.8,-4.05) 12(-7.4,4.05) 13(-7,-4.05) 14(-6.6,4.05) 15(-6.2,-4.05) 16(-5.8,4.05) 17(-2.2,-4.05) 18(-1.8,4.05) 19(-1.4,-4.05) 20(-1,4.05) 21(-0.6,-4.05) 22(-0.2,4.05) 23(0.2,-4.05) 24(0.6,4.05) 25(1,-4.05) 26(1.4,4.05) 27(1.8,-4.05) 28(2.2,4.05) 29(2.6,-4.05) 30(3,4.05) 31(3.4,-4.05) 32(3.8,4.05) 33(4.2,-4.05) 34(4.6,4.05) 35(5,-4.05) 36(5.4,4.05) 37(5.8,-4.05) 38(6.2,4.05) 39(6.6,-4.05) 40(7,4.05) 41(7.4,-4.05) 42(7.8,4.05) 43(8.2,-4.05) 44(8.6,4.05) 45(9,-4.05) 46(9.4,4.05) 47(9.8,-4.05) 48(10.2,4.05) 49(10.6,-4.05) 50(11,4.05) 51(11.4,-4.05) 52(11.8,4.05)
  rect 2.3x3 smd: 53(-14.45,-3.3) 54(14.45,-3.3)
  round 4.5 hole 3.2: 55(-12.1,48) 56(12.1,48)
CT_SM_B
  rect 1.6x2.6 smd: 1(-1.676,0) 2(1.676,0)
DC-49100500000W
  oval 3.7x1.6 hole 2.7x0.8: 1(0,-6.4) 2(0,-0.2)
  oval 1.6x3.7 hole 0.8x2.7: 3(-4.7,-3.4)
DFN2510_10
  oval 0.2x0.6 smd: 1(1,-0.4) 2(0.5,-0.4) 4(-0.5,-0.4) 5(-1,-0.4) 6(-1,0.4) 7(-0.5,0.4) 9(0.5,0.4) 10(1,0.4)
  rect 0.4x0.6 smd: 3(0,-0.4) 8(0,0.4)
DO-214AC
  rect 1.7x1.9 smd: 1(-2.2,0) 2(2.2,0)
F1812
  rect 1.5x3.5 smd: 1(-2.05,0) 2(2.05,0)
FB0603
  rect 0.965x0.965 smd: 1(-0.8,0) 2(0.8,0)
FB0805
  rect 1.35x1.4 smd: 1(-1.1,0) 2(1.1,0)
FPC50_0A5_SM_H
  oval 0.229x1.524 smd: 1(0,0) 2(-0.5,0) 3(-1,0) 4(-1.5,0) 5(-2,0) 6(-2.5,0) 7(-3,0) 8(-3.5,0) 9(-4,0) 10(-4.5,0) 11(-5,0) 12(-5.5,0) 13(-6,0) 14(-6.5,0) 15(-7,0) 16(-7.5,0) 17(-8,0) 18(-8.5,0) 19(-9,0) 20(-9.5,0) 21(-10,0) 22(-10.5,0) 23(-11,0) 24(-11.5,0) 25(-12,0) 26(-12.5,0) 27(-13,0) 28(-13.5,0) 29(-14,0) 30(-14.5,0) 31(-15,0) 32(-15.5,0) 33(-16,0) 34(-16.5,0) 35(-17,0) 36(-17.5,0) 37(-18,0) 38(-18.5,0) 39(-19,0) 40(-19.5,0) 41(-20,0) 42(-20.5,0) 43(-21,0) 44(-21.5,0) 45(-22,0) 46(-22.5,0) 47(-23,0) 48(-23.5,0) 49(-24,0) 50(-24.5,0)
  rect 2x3 smd: 51(-27.04,2.413) 52(2.54,2.413)
LED0603
  rect 0.965x0.965 smd: 1(-0.8,0) 2(0.8,0)
LP_5A2X5A4
  rect 2.032x2.54 smd: 1(-2.05,0) 2(2.05,0)
MARK
  round 1.016 smd: 1(0,0)
MIC_DIP2
  rect 1.092x1.524 hole 0.711: 1(-0.7,0.45) 2(0.7,0.45)
MICROUSB-B-H4-2
  rect 2x0.4 smd: 1(5.45,1.3) 2(5.45,0.65) 3(5.45,0) 4(5.45,-0.65) 5(5.45,-1.3)
  oval 2x1.2 hole 0.85x0.65: 6(5.45,2.475) 7(5.45,-2.475)
  rect 2x2 hole 0.8x1.5: 8(2.625,3.6) 9(2.625,-3.6)
  rect 2x2 smd: 10(2.6,1.2) 11(2.6,-1.2)
NPTH3A5PAD6
  round 6 hole 3.5: 1(0,0)
PH2X11_2_TH_V
  round 1.4 hole 0.8: 1(-9,-1) 2(-9,1) 3(-7,-1) 4(-7,1) 5(-5,-1) 6(-5,1) 7(-3,-1) 8(-3,1) 9(-1,-1) 10(-1,1) 11(1,-1) 12(1,1) 13(3,-1) 14(3,1) 15(5,-1) 16(5,1) 17(7,-1) 18(7,1) 19(9,-1) 20(9,1) 21(11,-1) 22(11,1)
QFN24
  rect 0.76x0.3 smd: 1(-2.1,1.25) 2(-2.1,0.75) 3(-2.1,0.25) 4(-2.1,-0.25) 5(-2.1,-0.75) 6(-2.1,-1.25) 13(2.1,-1.25) 14(2.1,-0.75) 15(2.1,-0.25) 16(2.1,0.25) 17(2.1,0.75) 18(2.1,1.25)
  rect 0.3x0.76 smd: 7(-1.25,-2.1) 8(-0.75,-2.1) 9(-0.25,-2.1) 10(0.25,-2.1) 11(0.75,-2.1) 12(1.25,-2.1) 19(1.25,2.1) 20(0.75,2.1) 21(0.25,2.1) 22(-0.25,2.1) 23(-0.75,2.1) 24(-1.25,2.1)
  rect 2.7x2.7 smd: 25(0,0)
QFN32-19P7-2TH
  oval 0.813x0.305 smd: 1(-2.525,1.75) 2(-2.525,1.25) 3(-2.525,0.75) 4(-2.525,0.25) 5(-2.525,-0.25) 6(-2.525,-0.75) 7(-2.525,-1.25) 8(-2.525,-1.75) 17(2.525,-1.75) 18(2.525,-1.25) 19(2.525,-0.75) 20(2.525,-0.25) 21(2.525,0.25) 22(2.525,0.75) 23(2.525,1.25) 24(2.525,1.75)
  oval 0.305x0.813 smd: 9(-1.75,-2.525) 10(-1.25,-2.525) 11(-0.75,-2.525) 12(-0.25,-2.525) 13(0.25,-2.525) 14(0.75,-2.525) 15(1.25,-2.525) 16(1.75,-2.525) 25(1.75,2.525) 26(1.25,2.525) 27(0.75,2.525) 28(0.25,2.525) 29(-0.25,2.525) 30(-0.75,2.525) 31(-1.25,2.525) 32(-1.75,2.525)
  rect 3.607x3.607 smd: 33(0,0)
QFN36_0A5_6X6
  rect 0.9x0.28 smd: 1(-3,2) 2(-3,1.5) 3(-3,1) 4(-3,0.5) 5(-3,0) 6(-3,-0.5) 7(-3,-1) 8(-3,-1.5) 9(-3,-2) 19(3,-2) 20(3,-1.5) 21(3,-1) 22(3,-0.5) 23(3,0) 24(3,0.5) 25(3,1) 26(3,1.5) 27(3,2)
  rect 0.28x0.9 smd: 10(-2,-3) 11(-1.5,-3) 12(-1,-3) 13(-0.5,-3) 14(0,-3) 15(0.5,-3) 16(1,-3) 17(1.5,-3) 18(2,-3) 28(2,3) 29(1.5,3) 30(1,3) 31(0.5,3) 32(0,3) 33(-0.5,3) 34(-1,3) 35(-1.5,3) 36(-2,3)
  rect 3.7x3.7 smd: 37(0,0)
QFN72_0P5_10X10_4P85SQ
  oval 0.838x0.279 smd: 1(-4.925,4.25) 18(-4.925,-4.248) 37(4.925,-4.248) 54(4.925,4.25)
  rect 0.838x0.279 smd: 2(-4.925,3.75) 3(-4.925,3.25) 4(-4.925,2.75) 5(-4.925,2.25) 6(-4.925,1.751) 7(-4.925,1.251) 8(-4.925,0.751) 9(-4.925,0.251) 10(-4.925,-0.249) 11(-4.925,-0.749) 12(-4.925,-1.249) 13(-4.925,-1.749) 14(-4.925,-2.248) 15(-4.925,-2.748) 16(-4.925,-3.248) 17(-4.925,-3.748) 38(4.925,-3.748) 39(4.925,-3.248) 40(4.925,-2.748) 41(4.925,-2.248) 42(4.925,-1.749) 43(4.925,-1.249) 44(4.925,-0.749) 45(4.925,-0.249) 46(4.925,0.251) 47(4.925,0.751) 48(4.925,1.251) 49(4.925,1.751) 50(4.925,2.25) 51(4.925,2.75) 52(4.925,3.25) 53(4.925,3.75)
  oval 0.279x0.838 smd: 19(-4.25,-4.925) 36(4.248,-4.925) 55(4.248,4.925) 72(-4.25,4.925)
  rect 0.279x0.838 smd: 20(-3.75,-4.925) 21(-3.25,-4.925) 22(-2.75,-4.925) 23(-2.25,-4.925) 24(-1.751,-4.925) 25(-1.251,-4.925) 26(-0.751,-4.925) 27(-0.251,-4.925) 28(0.249,-4.925) 29(0.749,-4.925) 30(1.249,-4.925) 31(1.749,-4.925) 32(2.248,-4.925) 33(2.748,-4.925) 34(3.248,-4.925) 35(3.748,-4.925) 56(3.748,4.925) 57(3.248,4.925) 58(2.748,4.925) 59(2.248,4.925) 60(1.749,4.925) 61(1.249,4.925) 62(0.749,4.925) 63(0.249,4.925) 64(-0.251,4.925) 65(-0.751,4.925) 66(-1.251,4.925) 67(-1.751,4.925) 68(-2.25,4.925) 69(-2.75,4.925) 70(-3.25,4.925) 71(-3.75,4.925)
  rect 4.851x4.851 smd: 73(0,0)
R0402
  rect 0.5x0.6 smd: 1(-0.479,0) 2(0.479,0)
R0603
  rect 0.965x0.965 smd: 1(-0.8,0) 2(0.8,0)
R0805
  rect 1.35x1.4 smd: 1(-1.1,0) 2(1.1,0)
R1206
  rect 1.397x1.651 smd: 1(-1.397,0) 2(1.397,0)
RJ45-HR91105A
  round 3.3 hole 3.3 unplated: (-5.72,0) (5.72,0)
  round 1.5 hole 0.8: 1(4.45,-6.35) 2(3.18,-8.89) 3(1.91,-6.35) 4(0.64,-8.89) 5(-0.63,-6.35) 6(-1.9,-8.89) 7(-3.17,-6.35) 8(-4.44,-8.89)
  round 1.6 hole 0.9: 9(6.619,4.9) 10(4.079,4.9) 11(-4.079,4.9) 12(-6.619,4.9)
  round 2.5 hole 1.57: 13(-7.879,-3.051) 14(7.879,-3.051)
RL-UM02WBS-8723BU
  oval 2x1 smd: 1(-6.3,3.9) 2(-6.3,1.6) 3(-6.3,-1.05) 4(-6.3,-3.2) 5(6.3,3.4) 6(6.3,0.9) 7(6.3,-2.6) 8(6.3,-5.4)
  oval 1x2 smd: 9(3.65,-6.9) 10(2.38,-6.9) 11(1.11,-6.9) 12(-0.16,-6.9) 13(-1.43,-6.9) 14(-2.7,-6.9)
RN4_0402
  rect 0.3x0.6 smd: 1(-0.75,0.56) 2(-0.25,0.56) 3(0.25,0.56) 4(0.75,0.56) 5(0.75,-0.56) 6(0.25,-0.56) 7(-0.25,-0.56) 8(-0.75,-0.56)
SD-MR01A-01211
  round 1 hole 1 unplated: (-4.85,-3.1) (3.15,-3.1)
  oval 0.7x1.8 smd: 1(2.35,7.4) 2(1.25,7.4) 3(0.15,7.4) 4(-0.95,7.4) 5(-2.05,7.4) 6(-3.15,7.4) 7(-4.25,7.4) 8(-5.35,7.4) 9(-6.45,7.4)
  rect 1.5x1.6 smd: 10(-7.9,6.9)
  rect 1.65x1.65 smd: 11(7.25,6.9)
  rect 1.8x2 smd: 12(-7.85,-2.7) 13(7.95,-2.7)
SENSOR_AP3216C
  rect 0.9x0.7 smd: 1(-0.75,1.455) 2(-0.75,0.485) 3(-0.75,-0.485) 4(-0.75,-1.455) 5(0.75,-1.455) 6(0.75,-0.485) 7(0.75,0.485) 8(0.75,1.455)
SENSOR_ICM-20608
  rect 0.8x0.3 smd: 1(-1.565,1) 2(-1.565,0.5) 3(-1.565,0) 4(-1.565,-0.5) 5(-1.565,-1) 9(1.565,-1) 10(1.565,-0.5) 11(1.565,0) 12(1.565,0.5) 13(1.565,1)
  rect 0.3x0.8 smd: 6(-0.5,-1.565) 7(0,-1.565) 8(0.5,-1.565) 14(0.5,1.565) 15(0,1.565) 16(-0.5,1.565)
SIM_CARD_13X14A5
  oval 0.8x2.2 smd: 1(4.019,-13.478) 2(-8.972,-1.482) 3(4.019,-1.482) 4(-8.972,-13.478)
  rect 0.7x1.15 smd: C1(-2.22,0) C2(-4.76,0) C3(-7.3,0) C5(-0.95,0) C6(-3.49,0) C7(-6.03,0) CD(0,0)
SIP2_1A25_TH_V
  oval 0.9x1.6 hole 0.6x1.3: 1(0,0) 2(1.25,0)
SIP4_2_TH_V
  rect 1.2x1.4 hole 0.762: 1(0,0)
  oval 1.2x1.4 hole 0.762: 2(2,0) 3(4,0) 4(6,0)
SOD123FL
  rect 1x1.4 smd: 1(1.85,0) 2(-1.85,0)
SOD323
  rect 1.016x0.508 smd: 1(2.54,0) 2(0,0)
SOIC8
  rect 0.6x1.6 smd: 1(-1.905,-2.8) 2(-0.635,-2.8) 3(0.635,-2.8) 4(1.905,-2.8) 5(1.905,2.8) 6(0.635,2.8) 7(-0.635,2.8) 8(-1.905,2.8)
SOT23
  rect 0.92x0.92 smd: 1(-0.95,-1) 2(0.95,-1)
  rect 0.92x1.27 smd: 3(0,1.1)
SOT23_5
  rect 0.5x1 smd: 1(-0.95,-1.4) 2(0,-1.4) 3(0.95,-1.4) 4(0.95,1.4) 5(-0.95,1.4)
SOT23_6
  rect 0.5x1 smd: 1(-0.95,-1.4) 2(0,-1.4) 3(0.95,-1.4) 4(0.95,1.4) 5(0,1.4) 6(-0.95,1.4)
SW2X4_2A54_10A8X14A5
  round 1.6 hole 1: 1(-3.81,-3.81) 2(-1.27,-3.81) 3(1.27,-3.81) 4(3.81,-3.81) 5(3.81,3.81) 6(1.27,3.81) 7(-1.27,3.81) 8(-3.81,3.81)
SW4_5A2_SM
  oval 2x1.2 smd: 1(-3.2,1.85) 2(3.2,1.85) 3(-3.2,-1.85) 4(3.2,-1.85)
SW4_TH_6X6
  round 1.6 hole 1: 1(-2.25,-2.5) 2(2.25,-2.5)
  round 2.5 hole 1.3: 3(3.5,0) 4(-3.5,0)
SW5_4A7_12A7
  oval 2x3 hole 1x1.6: 1(-4.7,0) 2(0,0) 3(4.7,0) 4(-6.5,-9.2) 5(6.5,-9.2)
TP_0A9MM
  round 0.889 smd: 1(0,0)
TSOT23_8_0P65_2X1
  rect 1.219x0.432 smd: 1(-1.31,0.975) 2(-1.31,0.325) 3(-1.31,-0.325) 4(-1.31,-0.975) 5(1.31,-0.975) 6(1.31,-0.325) 7(1.31,0.325) 8(1.31,0.975)
TSSOP16
  oval 1.6x0.27 smd: 1(-2.9,2.275) 2(-2.9,1.625) 3(-2.9,0.975) 4(-2.9,0.325) 5(-2.9,-0.325) 6(-2.9,-0.975) 7(-2.9,-1.625) 8(-2.9,-2.275) 9(2.9,-2.275) 10(2.9,-1.625) 11(2.9,-0.975) 12(2.9,-0.325) 13(2.9,0.325) 14(2.9,0.975) 15(2.9,1.625) 16(2.9,2.275)
TSSOP48-19P7X295
  oval 0.305x1.626 smd: 1(-5.754,-3.747) 2(-5.254,-3.747) 3(-4.754,-3.747) 4(-4.253,-3.747) 5(-3.753,-3.747) 6(-3.252,-3.747) 7(-2.752,-3.747) 8(-2.252,-3.747) 9(-1.751,-3.747) 10(-1.251,-3.747) 11(-0.751,-3.747) 12(-0.25,-3.747) 13(0.25,-3.747) 14(0.751,-3.747) 15(1.251,-3.747) 16(1.751,-3.747) 17(2.252,-3.747) 18(2.752,-3.747) 19(3.252,-3.747) 20(3.753,-3.747) 21(4.253,-3.747) 22(4.754,-3.747) 23(5.254,-3.747) 24(5.754,-3.747) 25(5.754,3.747) 26(5.254,3.747) 27(4.754,3.747) 28(4.253,3.747) 29(3.753,3.747) 30(3.252,3.747) 31(2.752,3.747) 32(2.252,3.747) 33(1.751,3.747) 34(1.251,3.747) 35(0.751,3.747) 36(0.25,3.747) 37(-0.25,3.747) 38(-0.751,3.747) 39(-1.251,3.747) 40(-1.751,3.747) 41(-2.252,3.747) 42(-2.752,3.747) 43(-3.252,3.747) 44(-3.753,3.747) 45(-4.253,3.747) 46(-4.754,3.747) 47(-5.254,3.747) 48(-5.754,3.747)
TVS0402
  rect 0.5x0.6 smd: 1(-0.479,0) 2(0.479,0)
USB2-A
  round 1.524 hole 0.914: 1(3.5,-6.885) 2(0.996,-6.885) 3(-0.998,-6.885) 4(-3.5,-6.885) 5(3.5,-4.265) 6(0.996,-4.265) 7(-0.998,-4.265) 8(-3.5,-4.265)
  round 4 hole 2.3: 9(-6.57,-1.555) 10(6.57,-1.555) 11(-6.57,-7.235) 12(6.57,-7.235)
XR4_3225_SM
  rect 1.3x0.9 smd: 1(-1.2,-0.85) 2(1.2,-0.85) 3(1.2,0.85) 4(-1.2,0.85)
YOUPK37X39_1_00-SMD
  oval 2x0.6 smd: 1(-18.3,17.5) 2(-18.3,16.5) 3(-18.3,15.5) 4(-18.3,14.5) 5(-18.3,13.5) 6(-18.3,12.5) 7(-18.3,11.5) 8(-18.3,10.5) 9(-18.3,9.5) 10(-18.3,8.5) 11(-18.3,7.5) 12(-18.3,6.5) 13(-18.3,5.5) 14(-18.3,4.5) 15(-18.3,3.5) 16(-18.3,2.5) 17(-18.3,1.5) 18(-18.3,0.5) 19(-18.3,-0.5) 20(-18.3,-1.5) 21(-18.3,-2.5) 22(-18.3,-3.5) 23(-18.3,-4.5) 24(-18.3,-5.5) 25(-18.3,-6.5) 26(-18.3,-7.5) 27(-18.3,-8.5) 28(-18.3,-9.5) 29(-18.3,-10.5) 30(-18.3,-11.5) 31(-18.3,-12.5) 32(-18.3,-13.5) 33(-18.3,-14.5) 34(-18.3,-15.5) 35(-18.3,-16.5) 36(-18.3,-17.5) 71(18.3,-17.5) 72(18.3,-16.5) 73(18.3,-15.5) 74(18.3,-14.5) 75(18.3,-13.5) 76(18.3,-12.5) 77(18.3,-11.5) 78(18.3,-10.5) 79(18.3,-9.5) 80(18.3,-8.5) 81(18.3,-7.5) 82(18.3,-6.5) 83(18.3,-5.5) 84(18.3,-4.5) 85(18.3,-3.5) 86(18.3,-2.5) 87(18.3,-1.5) 88(18.3,-0.5) 89(18.3,0.5) 90(18.3,1.5) 91(18.3,2.5) 92(18.3,3.5) 93(18.3,4.5) 94(18.3,5.5) 95(18.3,6.5) 96(18.3,7.5) 97(18.3,8.5) 98(18.3,9.5) 99(18.3,10.5) 100(18.3,11.5) 101(18.3,12.5) 102(18.3,13.5) 103(18.3,14.5) 104(18.3,15.5) 105(18.3,16.5) 106(18.3,17.5)
  oval 0.6x2 smd: 37(-16.5,-19.3) 38(-15.5,-19.3) 39(-14.5,-19.3) 40(-13.5,-19.3) 41(-12.5,-19.3) 42(-11.5,-19.3) 43(-10.5,-19.3) 44(-9.5,-19.3) 45(-8.5,-19.3) 46(-7.5,-19.3) 47(-6.5,-19.3) 48(-5.5,-19.3) 49(-4.5,-19.3) 50(-3.5,-19.3) 51(-2.5,-19.3) 52(-1.5,-19.3) 53(-0.5,-19.3) 54(0.5,-19.3) 55(1.5,-19.3) 56(2.5,-19.3) 57(3.5,-19.3) 58(4.5,-19.3) 59(5.5,-19.3) 60(6.5,-19.3) 61(7.5,-19.3) 62(8.5,-19.3) 63(9.5,-19.3) 64(10.5,-19.3) 65(11.5,-19.3) 66(12.5,-19.3) 67(13.5,-19.3) 68(14.5,-19.3) 69(15.5,-19.3) 70(16.5,-19.3) 107(16.5,19.3) 108(15.5,19.3) 109(14.5,19.3) 110(13.5,19.3) 111(12.5,19.3) 112(11.5,19.3) 113(10.5,19.3) 114(9.5,19.3) 115(8.5,19.3) 116(7.5,19.3) 117(6.5,19.3) 118(5.5,19.3) 119(4.5,19.3) 120(3.5,19.3) 121(2.5,19.3) 122(1.5,19.3) 123(0.5,19.3) 124(-0.5,19.3) 125(-1.5,19.3) 126(-2.5,19.3) 127(-3.5,19.3) 128(-4.5,19.3) 129(-5.5,19.3) 130(-6.5,19.3) 131(-7.5,19.3) 132(-8.5,19.3) 133(-9.5,19.3) 134(-10.5,19.3) 135(-11.5,19.3) 136(-12.5,19.3) 137(-13.5,19.3) 138(-14.5,19.3) 139(-15.5,19.3) 140(-16.5,19.3)

## Nets
1V2_AVCC: C75.1 C76.1 C77.1 FB5.1 U15.60(AVCC12#60) U15.66(AVCC12#66)
1V2_IOVCC: C78.1 C79.1 C80.1 C81.1 C82.1 C83.1 FB6.1 U15.5(CVCC12#5) U15.12(CVCC12#12) U15.26(CVCC12#26) U15.42(CVCC12#42) U15.47(CVCC12#47) U15.53(CVCC12#53)
3V3_IOVCC: C84.1 C85.1 C86.1 D4.1 FB7.1 R99.1 R101.1 R102.1 R107.1 U15.3(IOVCC#3) U15.21(IOVCC#21) U15.46(IOVCC#46)
GND: ANT1.2(G1) ANT1.3(G2) C1.2 C3.2 C4.2 C6.2 C7.2 C8.2 C9.2 C10.2 C11.2 C12.2 C14.2 C15.2 C16.2 C17.2 C18.2 C20.2 C21.2 C23.2 C24.2 C25.2 C26.2 C27.2 C28.2 C29.2 C31.2 C32.2 C33.2 C34.2 C35.2 C37.1 C38.1 C39.2 C40.2 C41.2 C42.1 C43.2 C44.2 C45.2 C46.2 C47.2 C50.2 C52.2 C53.2 C54.2 C55.2 C56.1 C57.2 C58.2 C59.2 C61.2 C63.1 C64.1 C65.1 C66.1 C67.2 C70.1 C71.1 C72.1 C73.1 C75.2 C76.2 C77.2 C78.2 C79.2 C80.2 C81.2 C82.2 C83.2 C84.2 C85.2 C86.2 C88.2 C89.2 C90.2 C91.2 C92.2 C93.2 C94.2 C95.1 C96.1 C97.1 C98.2 C99.2 C100.1 C101.1 C102.2 C103.2 C104.2 C105.1 C111.2 C112.2 C113.1 C114.1 C115.2 C116.1 C117.2 C119.1 C120.1 C125.1 C127.1 C128.1 C129.2 C130.2 C131.2 C132.2 C133.2 C134.2 C135.2 C136.2 C138.2 C139.1 C140.1 C141.1 C142.1 C143.1 C144.1 C145.1 C146.2 C147.2 C149.2 C151.2 C152.2 C153.2 C154.2 C155.2 C156.2 C157.2 C158.2 C159.2 C160.2 C161.2 C162.2 C163.2 C164.2 C165.2 C166.2 C167.2 C168.2 C169.2 C170.2 C171.2 C172.2 C173.2 C174.1 C175.2 C177.2 C179.1 D2.1 D7.3 D8.3 E1.1 E2.1 E3.1 E4.1 E5.1 E6.1 E7.1 E8.1 E9.1 E10.1 E11.1 E12.1 E13.1 E14.1 E15.1 E16.3(GND1) E16.8(GND2) E17.3(GND1) E17.8(GND2) E18.3(GND1) E18.8(GND2) E19.2(CATHODE) E20.2(CATHODE) E21.1 E22.1 E23.1 E27.3(GND1) E27.8(GND2) E28.3(GND1) E28.8(GND2) E29.3(GND1) E29.8(GND2) E30.1 E31.1 E32.1 E33.1 E34.1 H1.1(GND) H2.1(GND) H3.1(GND) H4.1(GND) H5.1(GND) H6.1(GND) H7.1(GND) J1.2 J1.3 J2.6(GND) J2.10(GND1) J2.11(GND2) J2.12(GND3) J2.13(GND4) J3.5(GND) J4.1(TXD) J5.2(GND1) J5.4(GND2) J8.5(GND0) J8.6(GND1) J8.31(GND2) J8.39(GND3) J8.44(GND4) J8.50(GND5) J8.51 J8.52 J9.2(D2GND) J9.5(D1GND) J9.8(D0GND) J9.11(CKGND) J9.17(DDCGND) J10.1(GND) J12.5(GND) J13.4(GND1) J13.8(GND2) J14.4(GND#4) J14.9(GND#9) J14.15(GND#15) J14.18(GND#18) J14.21(GND#21) J14.26(GND#26) J14.27(GND#27) J14.29(GND#29) J14.34(GND#34) J14.35(GND#35) J14.37(GND#37) J14.40(GND#40) J14.43(GND#43) J14.50(GND#50) J14.53 J14.54 J14.55 J14.56 J15.1 J15.2 J15.3 J15.4 J15.C5(GND) J18.2(P2) KEY1.1 KEY1.2 KEY2.1 KEY2.2 KEY3.2 KEY3.3 KEY3.4 KEY4.2 KEY4.3 KEY4.4 LED1.2(CATHODE) Q2.2(SOURCE) Q3.2(EMITTER) R6.1 R7.1 R8.1 R13.2 R15.2 R18.1 R21.1 R22.1 R25.1 R30.1 R35.1 R36.1 R63.2 R68.1 R88.1 R89.1 R92.2 R95.2 R97.2 R98.1 R109.1 R110.1 R115.1 R124.2 R125.2 R127.2 R128.2 R137.1 R143.1 R145.1 R146.1 R147.1 R148.1 R150.2 R154.1 R173.2 R175.2 R177.2 R182.1 SW1.4 SW1.5 U1.6(GND#6) U1.16(GND#16) U1.23(GND#23) U1.26(GND#26) U1.29(GND#29) U1.32(GND#32) U1.35(GND#35) U1.36(GND#36) U1.50(GND#50) U1.59(GND#59) U1.68(GND#68) U1.71(GND#71) U1.74(GND#74) U1.77(GND#77) U1.86(GND#86) U1.95(GND#95) U1.104(GND#104) U1.113(GND#113) U1.121(GND#121) U1.128(GND#128) U2.4(GND) U3.4(PGND) U3.6(AGND) U4.4(GND) U5.2(GND) U5.25(EPAD) U6.2(GND) U7.9(RESV2) U7.10(RESV3) U7.11(RESV4) U7.12(RESV5) U7.13(GND) U7.15(RESV6) U8.8(GND) U9.3(GND) U11.25(VSS) U13.4(GND2) U13.10(GND3) U13.15(GND4) U13.21(GND5) U13.28(GND6) U13.34(GND7) U13.39(GND8) U13.45(GND1) U14.4(GND2) U14.10(GND3) U14.15(GND4) U14.21(GND5) U14.28(GND6) U14.34(GND7) U14.39(GND8) U14.45(GND1) U15.37(SD3) U15.38(MCLK) U15.39(SD2) U15.40(SD1) U15.41(SD0) U15.43(CGND) U15.44(WS) U15.45(SCK) U15.55(RSVDL) U15.57(IOGND) U15.63(AGND) U15.70(VDDQ) U15.73(E-PAD) U16.2(GND) U17.9(DGND) U17.20(SPKGND2) U17.24(SPKGND1) U17.28(AGND) U17.33(GND_PADDLE) U18.11(TEST) U18.37(VSS(FLAG)) U19.2(GND) U20.1(GND#1) U20.5(GND#5) U21.5(GND) U22.2(GND) X1.2(GND2) X1.4(GND4)
GNDE: C145.2 J3.6(SH1) J3.7(SH2) J3.8(SH3) J3.9(SH4) J3.10(SH5) J3.11(SH6) J12.6(SH1) J12.7(SH2) J12.8(SH3) J12.9(SH4) J12.10(SH5) J12.11(SH6) J13.9(SHELL1) J13.10(SHELL2) J13.11(SHELL3) J13.12(SHELL4) R154.2
GNDP: C174.2 J6.8(P8) J6.13(S1) J6.14(S2) J7.8(P8) J7.13(S1) J7.14(S2) J9.G1(GND1) J9.G2(GND2) J9.G3(GND3) J9.G4(GND4) R182.2
VDD_3V3: C15.1 C18.1 C28.1 C29.1 C39.1 C40.1 C45.1 C46.1 C47.1 C52.1 C53.1 C63.2 C64.2 C65.2 C66.2 C67.1 C69.1 C70.2 C71.2 C72.2 C73.2 C74.1 C90.1 C96.2 C97.2 C150.1 C167.1 C168.1 C172.1 FB1.2 FB2.1 FB3.1 FB7.2 FB8.1 FB13.1 FB14.2 J2.4(VDD) J4.2(RXD) J5.3(VDD_3V3) J8.3(3V3) J8.4(3V3_1) Q1.3(DRAIN) Q4.2(SOURCE) R12.2 R26.1 R28.1 R29.1 R31.1 R33.1 R34.1 R46.1 R47.1 R50.1 R51.2 R52.2 R53.2 R54.2 R55.1 R62.2 R64.2 R65.2 R66.2 R67.1 R74.1 R81.1 R85.1 R86.1 R144.1 R164.1 R167.2 R169.1 R181.1 T_3V3_1.1(TP) U6.5(VCC) U8.10(#SRCLR) U8.16(VCC) U9.1(VDD) U9.4(LEDA) U11.9(VDDIO) U13.1(1DIR) U13.7(VCCB1) U13.18(VCCB2) U13.24(2DIR) U13.31(VCCA1) U13.42(VCCA2) U14.1(1DIR) U14.7(VCCB1) U14.18(VCCB2) U14.24(2DIR) U14.31(VCCA1) U14.42(VCCA2) U16.1(VIN) U16.3(EN) U17.8(DCVDD) U17.10(DBVDD) U22.5(VIO)
VDD_3V3_PHY2: C54.1 C55.1 FB3.2 FB4.1 R70.1 R71.1 R72.1 R73.1 U11.1(VDD2A) U11.19(VDD1A)
VDD_3V3_USB_HUB: C130.1 C131.1 C132.1 C133.1 C134.1 C135.1 C136.1 FB13.2 R138.2 R140.1 U18.5(VDDA33#5) U18.10(VDDA33#10) U18.15(VDD33(REG)) U18.23(VDD33(IO)) U18.29(VDDA33#29) U18.36(VDDPLLREF/VDDA33)
VDD_4G_3.4V: C22.1 C23.1 C24.1 C25.1 C152.1 C153.1 C154.1 C155.1 C156.1 C157.1 C158.1 J14.2(VBAT#2) J14.24(VBAT#24) J14.39(VBAT#39) J14.41(VBAT#41) J14.52(VBAT#52) L3.2 R20.2 R156.2 T_4G1.1(TP)
VDD_A3V3: C94.1 C95.2 FB8.2 R126.1 U17.32(AVDD)
VDD_BAT: C173.1 J18.1(P1) U1.39(VDD_BAT)
VDD_CORE_3V3: C13.1 C14.1 C16.1 C17.1 FB14.1 L2.2 Q1.2(SOURCE) R10.1 R11.1 T_3V3_2.1(TP) U1.37(VDD_3V3#37) U1.38(VDD_3V3#38) U3.5(OUT)
VDD_EXT_1.8V: J14.11(VDD_EXT)
VDD_HDMI_1V2: C92.1 C93.1 FB5.2 FB6.2 U16.5(OUT)
VDD_SYS_12V: C1.1 C3.1 C4.1 C20.1 C21.1 D2.2 F1.2 R2.2 U2.2(IN) U4.2(IN)
VDD_WIFI_3V3: C149.1 C151.1 Q4.3(DRAIN) U20.8(VCC3V3)
4G_POWER_EN: R18.2 U1.10(SNVS_TAMPER5) U4.6(EN)
74595_CSI_PWREN: J5.5(PWEN) U8.5(QF)
74595_CSI_RST: J5.6(RST) U8.4(QE)
74595_HDMI_NRST: R101.2 U8.1(QB) U15.51(\\R\E\S\E\T\)
74595_USB_HUB_NRST: R140.2 R142.1 U8.2(QC)
74595_WIFI_PWREN: R165.1 U8.3(QD)
ADC1_CH2: J8.49(LR/ADC_LCD_ID) U1.42(GPIO1_IO02)
ADC1_CH3: J5.10(ADC1) U1.43(GPIO1_IO03)
ADC1_CH4: J5.12(ADC2) U1.44(GPIO1_IO04)
AUD_INT: R120.1 U1.11(SNVS_TAMPER4)
B_LCD_DATA0: J8.7(B0) RN1.8 U13.2(1B0) U15.32(D0)
B_LCD_DATA1: J8.8(B1) RN1.7 U13.3(1B1) U15.31(D1)
B_LCD_DATA2: J8.9(B2) RN1.6 U13.5(1B2) U15.30(D2)
B_LCD_DATA3: J8.10(B3) RN1.5 U13.6(1B3) U15.29(D3)
B_LCD_DATA4: J8.11(B4) RN2.8 U13.8(1B4) U15.28(D4)
B_LCD_DATA5: J8.12(B5) RN2.7 U13.9(1B5) U15.27(D5)
B_LCD_DATA6: J8.13(B6) RN2.6 U13.11(1B6) U15.25(D6)
B_LCD_DATA7: J8.14(B7) RN2.5 U13.12(1B7) U15.24(D7)
B_LCD_DATA8: J8.15(G0) RN3.8 U13.13(2B0) U15.23(D8)
B_LCD_DATA9: J8.16(G1) RN3.7 U13.14(2B1) U15.20(D9)
B_LCD_DATA10: J8.17(G2) RN3.6 U13.16(2B2) U15.19(D10)
B_LCD_DATA11: J8.18(G3) RN3.5 U13.17(2B3) U15.18(D11)
B_LCD_DATA12: J8.19(G4) RN4.8 U13.19(2B4) U15.17(D12)
B_LCD_DATA13: J8.20(G5) RN4.7 U13.20(2B5) U15.16(D13)
B_LCD_DATA14: J8.21(G6) RN4.6 U13.22(2B6) U15.15(D14)
B_LCD_DATA15: J8.22(G7) RN4.5 U13.23(2B7) U15.14(D15)
B_LCD_DATA16: J8.23(R0) RN5.8 U14.2(1B0) U15.13(D16)
B_LCD_DATA17: J8.24(R1) RN5.7 U14.3(1B1) U15.11(D17)
B_LCD_DATA18: J8.25(R2) RN5.6 U14.5(1B2) U15.10(D18)
B_LCD_DATA19: J8.26(R3) RN5.5 U14.6(1B3) U15.9(D19)
B_LCD_DATA20: J8.27(R4) RN6.8 U14.8(1B4) U15.8(D20)
B_LCD_DATA21: J8.28(R5) RN6.7 U14.9(1B5) U15.7(D21)
B_LCD_DATA22: J8.29(R6) RN6.6 U14.11(1B6) U15.6(D22)
B_LCD_DATA23: J8.30(R7) RN6.5 U14.12(1B7) U15.4(D23)
B_LCD_DE: J8.40(DEN) RN8.8 U14.19(2B4) U15.33(DE)
B_LCD_DISP: J8.34(DISP) RN7.7 U14.14(2B1)
B_LCD_HSYNC: J8.42(HSYNC) RN8.6 U14.22(2B6) U15.34(HSYNC)
B_LCD_PCLK: J8.43(PCLK) RN8.5 U14.23(2B7) U15.22(IDCK)
B_LCD_PWM: J8.32(BL_CN) R93.2
B_LCD_RESET: J8.33(RESET) RN7.8 U14.13(2B0)
B_LCD_TP_INT: J8.35(TP_INTN) R183.2
B_LCD_TP_RST: J8.36(TP_RESET) R184.2
B_LCD_VSYNC: J8.41(VSYNC) RN8.7 U14.20(2B5) U15.35(VSYNC)
BOOT_MODE0: SW2.3(ON3) U1.4(BOOT_MODE0) U8.14(SER)
BOOT_MODE1: SW2.4(ON4) U1.5(BOOT_MODE1) U8.11(SRCLK)
CP2104_RXD: U5.20(RXD) U6.6(1Y)
CP2104_TXD: U5.21(TXD) U6.3(2A)
CSI_DATA0: J5.15(D0) U1.136(CSI_DATA0)
CSI_DATA1: J5.16(D1) U1.135(CSI_DATA1)
CSI_DATA2: J5.17(D2) U1.134(CSI_DATA2)
CSI_DATA3: J5.18(D3) U1.133(CSI_DATA3)
CSI_DATA4: J5.19(D4) U1.132(CSI_DATA4)
CSI_DATA5: J5.20(D5) U1.131(CSI_DATA5)
CSI_DATA6: J5.21(D6) U1.130(CSI_DATA6)
CSI_DATA7: J5.22(D7) U1.129(CSI_DATA7)
CSI_HSYNC: J5.14(HSYNC) U1.138(CSI_HSYNC)
CSI_MCLK: J5.9(MCLK) U1.140(CSI_MCLK)
CSI_PIXCLK: J5.11(PCLK) U1.139(CSI_PIXCLK)
CSI_VSYNC: J5.13(VSYNC) U1.137(CSI_VSYNC)
ECSPI3_MISO: R58.1 U1.57(UART2_RTS)
ECSPI3_MOSI: R59.1 U1.58(UART2_CTS)
ECSPI3_SCLK: R56.1 U1.56(UART2_RXD)
ECSPI3_SS0: R60.1 U1.55(UART2_TXD)
ENET1_LED1: J6.9(LLED+) U1.69(ETH1_LED1)
ENET1_LED2: J6.11(RLED-) U1.70(ETH1_LED2)
ENET1_RXN: E28.2(IN2) E28.9(OUT2) J6.6(P6) U1.75(ETH1_RXN)
ENET1_RXP: E28.1(IN1) E28.10(OUT1) J6.3(P3) U1.76(ETH1_RXP)
ENET1_TXN: E28.5(IN4) E28.6(OUT4) J6.2(P2) U1.72(ETH1_TXN)
ENET1_TXP: E28.4(IN3) E28.7(OUT3) J6.1(P1) U1.73(ETH1_TXP)
ENET2_CRS_DV: R79.1 U1.80(ENET2_CRS_DV)
ENET2_NRST: C56.2 R74.2 U1.9(SNVS_TAMPER6) U11.15(\\R\S\T\)
ENET2_RXD0: R77.1 U1.79(ENET2_RXD0)
ENET2_RXD1: R78.1 U1.82(ENET2_RXD1)
ENET2_RXER: R80.1 U1.81(ENET2_RXER)
ENET2_TX_CLK: R87.1 U1.78(ENET2_TX_CLK)
ENET2_TXD0: R82.1 U1.85(ENET2_TXD0)
ENET2_TXD1: R83.1 U1.84(ENET2_TXD1)
ENET2_TXEN: R84.1 U1.83(ENET2_TXEN)
ENET_MDC: R76.1 U1.47(MDC)
ENET_MDIO: R75.1 U1.46(MDIO)
ETH2_LED1: J7.9(LLED+) U11.3(LED1/REGOFF)
ETH2_LED2: J7.11(RLED-) U11.2(LED2/I\N\T\S\E\L\)
ETH2_RXN: E29.2(IN2) E29.9(OUT2) J7.6(P6) R73.2 U11.22(RXN)
ETH2_RXP: E29.1(IN1) E29.10(OUT1) J7.3(P3) R72.2 U11.23(RXP)
ETH2_TXN: E29.5(IN4) E29.6(OUT4) J7.2(P2) R71.2 U11.20(TXN)
ETH2_TXP: E29.4(IN3) E29.7(OUT3) J7.1(P1) R70.2 U11.21(TXP)
EXT_SW: R97.1 U15.56(EXT_SWING)
GPIO1_IO01: R62.1 U1.41(GPIO1_IO01) U7.6(INT)
GPIO4_IO14: R48.2 U1.120(NAND_CE1(B5))
GPIO4_IO16: R64.1 U1.119(NAND_DQS(E6)) U9.7(INT)
HDMI_5V_CN: C5.1 C6.1 C7.1 C8.1 C11.1 C12.1 C88.1 C89.1 C129.1 C146.1 C147.1 C169.1 C170.1 C179.2 D3.1 F2.1 FB9.1 J5.1(VDD_5V) J9.18(+5V) L1.2 R5.2 R9.1 R103.2 R105.2 R168.2 R170.2 T_5V1.1(TP) U1.24(USB_OTG2_VBUS) U3.2(VIN) U19.5(IN) U22.3(VCC)
HDMI_CECA: E18.1(IN1) E18.10(OUT1) J9.13(CEC) R96.2 U15.71(CEC_A)
HDMI_CECD: U15.50(CEC_ID)
HDMI_CLKN_CN: E17.5(IN4) E17.6(OUT4) J9.12(CK-) U15.58(TXC-)
HDMI_CLKP_CN: E17.4(IN3) E17.7(OUT3) J9.10(CK+) U15.59(TXC+)
HDMI_DSCL: E18.2(IN2) E18.9(OUT2) J9.15(SCL) R103.1 U15.49(DSCL)
